# Altium PCB BatteryTestV1.1.PcbDoc (part 2 of 2)
Units mm, origin at the board's own origin, x right, y up, seen from the top; angles counter-clockwise.
Board outline 100 x 100 mm, 2 copper layers (Top Layer, Bottom Layer); 261 components, 215 nets, 797 pads, 447 vias.
Unrouted connection lines stored in the file: 1.
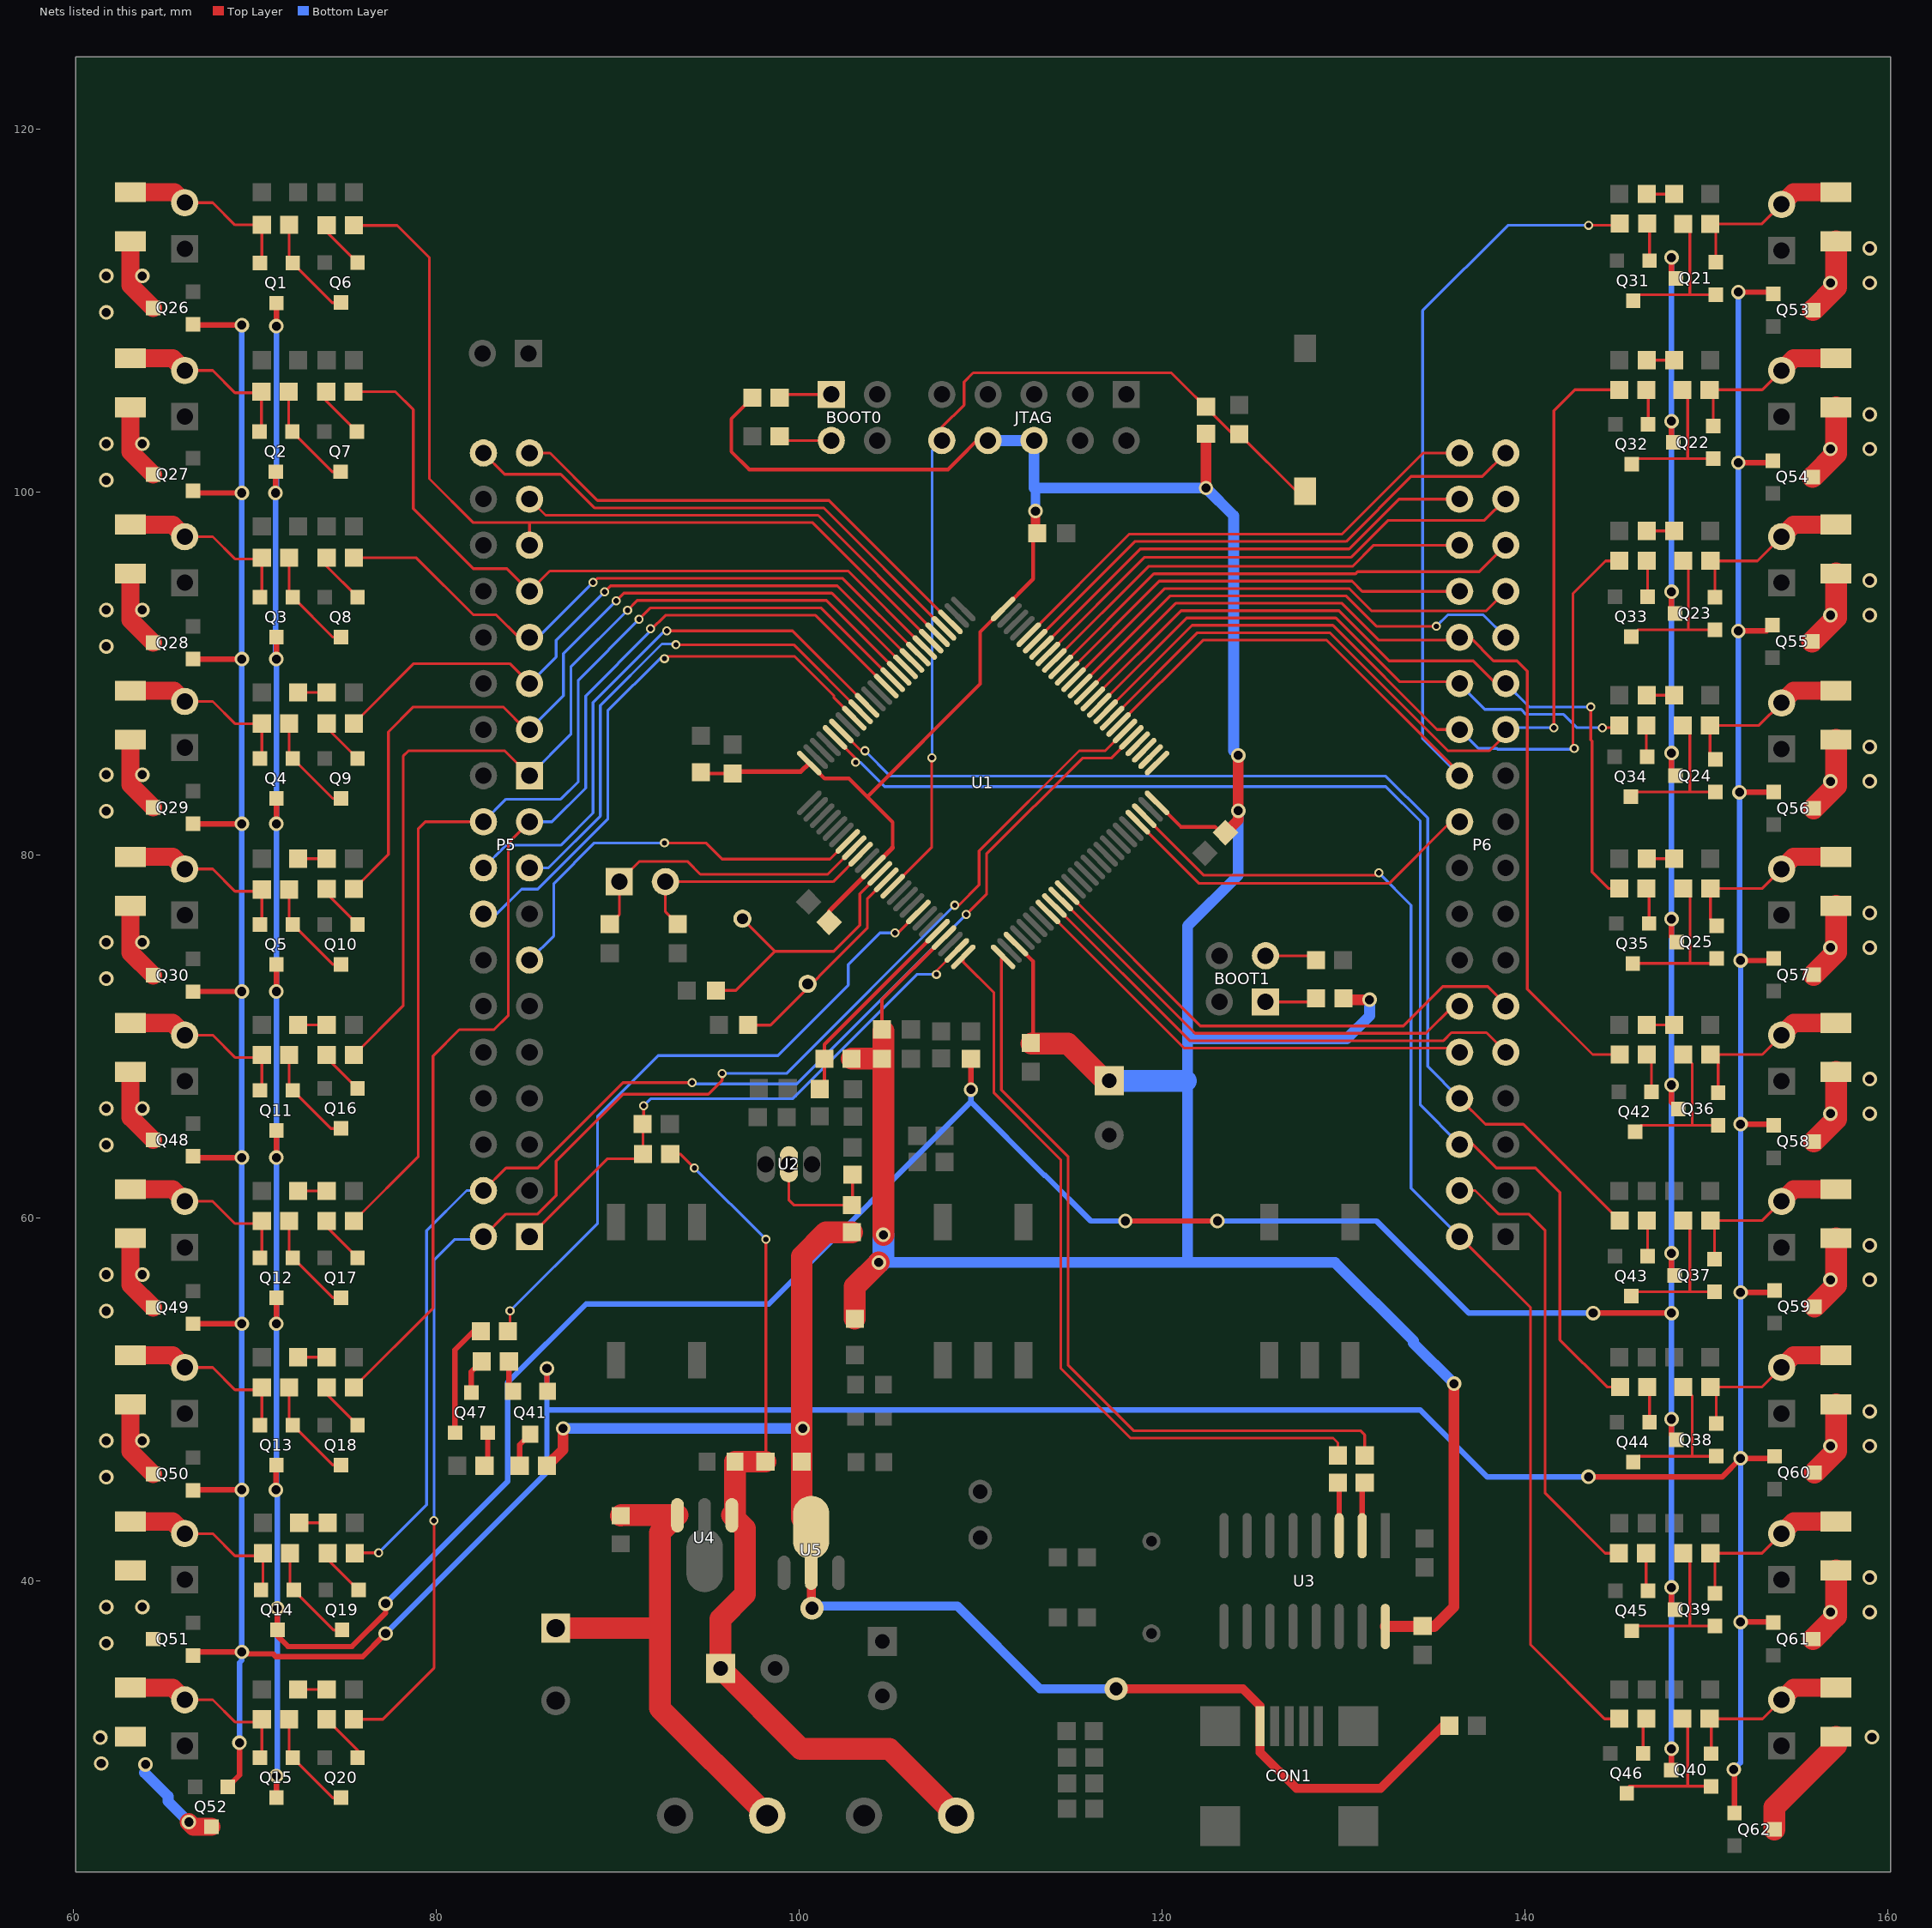
[diagram p2: the nets of this part, all layers, seen from the top]

## Via types
v1: diameter 0.5, hole 0.3, Top Layer to Bottom Layer, tented both sides, 269 vias
v2: diameter 0.8, hole 0.5, Top Layer to Bottom Layer, tented both sides, 174 vias
v3: diameter 0.9, hole 0.9, Top Layer to Bottom Layer, tented both sides, 2 vias
v4: diameter 1.27, hole 0.711, Top Layer to Bottom Layer, tented both sides, 2 vias

## Nets (pads, with @x,y where several pads share a name; then routed paths per layer and width w, separated by ;. In a path a pad name is that pad's centre, name@x,y a point inside that pad or via, vN(x,y) a via of type N, cw(c..) or ccw(c..) an arc to the next point about the centre after c; other vN are vias at no path point) (continued)
NetLED8_2: LED8.2 R74.2 | length 1.6
  Top Layer w0.152: LED8.2@72.399,88.935 R74.2@73.967,88.935
NetLED9_2: LED9.2 R77.1 | length 1.5
  Top Layer w0.152: R77.1@146.71,70.624 LED9.2@148.225,70.624
NetLED10_2: LED10.2 R76.2 | length 1.6
  Top Layer w0.152: LED10.2@72.399,79.78 R76.2@73.967,79.78
NetLED11_2: LED11.2 R79.1 | length 1.5
  Top Layer w0.152: R79.1@146.71,79.78 LED11.2@148.225,79.78
NetLED12_2: LED12.2 R78.2 | length 1.6
  Top Layer w0.152: LED12.2@72.399,70.624 R78.2@73.967,70.624
NetLED13_2: LED13.2 R81.1 | length 1.5
  Top Layer w0.152: R81.1@146.71,88.783 LED13.2@148.225,88.783
NetLED14_2: LED14.2 R80.2 | length 1.6
  Top Layer w0.152: LED14.2@72.399,61.469 R80.2@73.967,61.469
NetLED15_2: LED15.2 R83.1 | length 1.5
  Top Layer w0.152: R83.1@146.71,97.837 LED15.2@148.225,97.837
NetLED16_2: LED16.2 R82.2 | length 1.6
  Top Layer w0.152: LED16.2@72.399,52.313 R82.2@73.967,52.313
NetLED17_2: LED17.2 R85.1 | length 1.5
  Top Layer w0.152: R85.1@146.71,107.25 LED17.2@148.225,107.25
NetLED18_2: LED18.2 R84.2 | length 1.6
  Top Layer w0.152: LED18.2@72.45,43.183 R84.2@74.018,43.183
NetLED19_2: LED19.2 R87.1 | length 1.5
  Top Layer w0.152: R87.1@146.71,116.402 LED19.2@148.225,116.402
NetLED20_2: LED20.2 R86.2 | length 1.6
  Top Layer w0.152: LED20.2@72.399,34.002 R86.2@73.967,34.002
NetP7_1: BOOT1.1 R88.1 | length 2.9
  Top Layer w0.152: BOOT1.1@125.705,71.888 128.301,71.888 R88.1@128.499,72.085
NetP7_3: BOOT1.3 R104.1 | length 2.9
  Top Layer w0.152: BOOT1.3@125.705,74.428 128.251,74.428 R104.1@128.485,74.193
NetP8_1: BOOT0.1 R109.1 | length 2.9
  Top Layer w0.152: R109.1@98.933,105.181 99.111,105.359 BOOT0.1@101.778,105.359
NetP8_3: BOOT0.3 R110.1 | length 2.9
  Top Layer w0.152: R110.1@98.933,103.048 99.162,102.819 BOOT0.3@101.778,102.819
NetQ1_1: Q1.1 Q6.1 R1.1 | length 5.8
  Top Layer w0.152: R1.1@71.899,114.701 71.899,112.794 Q1.1@72.099,112.594 74.274,110.419 Q6.1@74.767,110.419
NetQ1_3: Q1.3 Q2.3 Q3.3 Q4.3 Q5.3 Q11.3 Q12.3 Q13.3 Q14.3 Q15.3 Q21.3 Q22.3 Q23.3 Q24.3 Q25.3 Q36.3 Q37.3 Q38.3 Q39.3 Q40.3 R21.2 | length 289
  Top Layer w0.3: v2(71.145,99.934) 71.145,101.074 Q2.3@71.174,101.103 ; v2(71.171,44.997) 71.171,46.343 Q13.3@71.199,46.371 ; v2(71.196,29.235) 71.199,29.232 Q15.3@71.199,28.034 ; v2(71.196,54.153) 71.196,55.588 Q12.3@71.199,55.591 ; v2(71.196,63.308) 71.196,64.81 Q11.3@71.199,64.813 ; v2(71.196,72.464) 71.196,73.954 Q5.3@71.199,73.957 ; v2(71.196,81.697) 71.196,83.098 Q4.3@71.199,83.101 ; v2(71.196,90.775) 71.196,91.988 Q3.3@71.199,91.991 ; v2(71.196,109.118) 71.199,109.122 Q1.3@71.199,110.394 ; Q14.3@71.247,37.279 v2(71.247,38.481) ; Q14.3@71.25,37.279 71.25,36.954 71.836,36.368 75.357,36.368 77.216,38.227 v2(77.216,38.735) ; v2(109.474,67.056) R21.2@109.474,68.758 ; v2(117.983,59.817) v2(123.063,59.817) ; v2(143.764,54.737) v2(148.082,54.737) ; Q40.3@148.074,29.566 148.082,29.573 v2(148.082,30.734) ; v2(148.082,39.624) 148.082,38.6 Q39.3@148.277,38.405 ; v2(148.082,48.895) 148.082,48.024 Q38.3@148.354,47.752 ; v2(148.082,58.039) 148.082,56.99 Q37.3@148.252,56.82 ; v2(148.082,67.31) 148.082,66.362 Q36.3@148.455,65.989 ; v2(148.082,76.454) 148.082,75.481 Q25.3@148.379,75.184 ; v2(148.082,85.598) 148.082,84.582 Q24.3@148.311,84.353 ; v2(148.082,94.488) 148.082,93.49 Q23.3@148.277,93.294 ; v2(148.082,103.886) 148.082,102.811 Q22.3@148.176,102.718 ; v2(148.082,112.903) 148.082,112.001 Q21.3@148.323,111.76
  Bottom Layer w0.3: v2(71.196,29.235) 71.272,29.312 71.247,29.337 v2(71.247,38.481) 71.247,44.921 v2(71.171,44.997) 71.196,45.023 v2(71.196,54.153) v2(71.196,63.308) v2(71.196,72.464) v2(71.196,81.697) v2(71.196,90.775) 71.145,90.826 v2(71.145,99.934) 71.196,99.985 v2(71.196,109.118) ; v2(77.216,38.735) 83.947,45.466 83.947,50.927 88.265,55.245 98.334,55.245 109.474,66.385 ; v2(109.474,67.056) 109.474,66.385 ; v2(117.983,59.817) 116.078,59.817 113.557,62.338 113.521,62.338 109.474,66.385 ; v2(123.063,59.817) 131.826,59.817 136.906,54.737 v2(143.764,54.737) ; v2(148.082,30.734) v2(148.082,39.624) v2(148.082,48.895) v2(148.082,54.737) v2(148.082,58.039) v2(148.082,67.31) v2(148.082,76.454) v2(148.082,85.598) v2(148.082,94.488) v2(148.082,103.886) v2(148.082,112.903)
NetQ2_1: Q2.1 Q7.1 R2.1 | length 5.9
  Top Layer w0.152: R2.1@71.874,105.512 71.874,103.503 Q2.1@72.074,103.303 74.274,101.103 Q7.1@74.742,101.103
NetQ3_1: Q3.1 Q8.1 R3.1 | length 5.8
  Top Layer w0.152: R3.1@71.899,96.368 71.899,94.391 Q3.1@72.099,94.191 74.299,91.991 Q8.1@74.767,91.991
NetQ4_1: Q4.1 Q9.1 R4.1 | length 5.6
  Top Layer w0.152: R4.1@71.899,87.224 71.899,85.501 Q4.1@72.099,85.301 74.299,83.101 Q9.1@74.767,83.101
NetQ5_1: Q5.1 Q10.1 R5.1 | length 5.6
  Top Layer w0.152: R5.1@71.899,78.08 71.899,76.357 Q5.1@72.099,76.157 74.299,73.957 Q10.1@74.767,73.957
NetQ6_2: Q6.2 R6.1 | length 2.8
  Top Layer w0.152: R6.1@73.967,114.676 73.967,114.319 Q6.2@75.667,112.619
NetQ7_2: Q7.2 R7.1 | length 2.9
  Top Layer w0.152: R7.1@73.942,105.512 73.942,105.003 Q7.2@75.642,103.303
NetQ8_2: Q8.2 R8.1 | length 2.9
  Top Layer w0.152: R8.1@73.967,96.368 73.967,95.891 Q8.2@75.667,94.191
NetQ9_2: Q9.2 R9.1 | length 2.6
  Top Layer w0.152: R9.1@73.967,87.224 73.967,87.001 Q9.2@75.667,85.301
NetQ10_2: Q10.2 R10.1 | length 2.7
  Top Layer w0.152: R10.1@73.967,78.105 73.967,77.857 Q10.2@75.667,76.157
NetQ11_1: Q11.1 Q16.1 R11.1 | length 5.6
  Top Layer w0.152: R11.1@71.899,68.961 71.899,67.213 Q11.1@72.099,67.013 74.198,64.915 Q16.1@74.767,64.915
NetQ12_1: Q12.1 Q17.1 R12.1 | length 5.7
  Top Layer w0.152: R12.1@71.899,59.817 71.899,57.991 Q12.1@72.099,57.791 74.299,55.591 Q17.1@74.767,55.591
NetQ13_1: Q13.1 Q18.1 R13.1 | length 5.7
  Top Layer w0.152: R13.1@71.899,50.648 71.899,48.771 Q13.1@72.099,48.571 74.299,46.371 Q18.1@74.767,46.371
NetQ14_1: Q14.1 Q19.1 R14.1 | length 5.7
  Top Layer w0.152: R14.1@71.95,41.504 71.95,39.679 Q14.1@72.15,39.479 74.35,37.279 Q19.1@74.818,37.279
NetQ15_1: Q15.1 Q20.1 R15.1 | length 5.8
  Top Layer w0.152: R15.1@71.899,32.36 71.899,30.434 Q15.1@72.099,30.234 74.299,28.034 Q20.1@74.767,28.034
NetQ16_2: Q16.2 R16.1 | length 2.6
  Top Layer w0.152: R16.1@73.967,68.961 73.967,68.815 Q16.2@75.667,67.115
NetQ17_2: Q17.2 R17.1 | length 2.7
  Top Layer w0.152: R17.1@73.967,59.817 73.967,59.491 Q17.2@75.667,57.791
NetQ18_2: Q18.2 R18.1 | length 2.8
  Top Layer w0.152: R18.1@73.967,50.648 73.967,50.271 Q18.2@75.667,48.571
NetQ19_2: Q19.2 R19.1 | length 2.7
  Top Layer w0.152: R19.1@74.018,41.504 74.018,41.179 Q19.2@75.718,39.479
NetQ20_2: Q20.2 R20.1 | length 2.8
  Top Layer w0.152: R20.1@73.967,32.36 75.667,30.66 Q20.2@75.667,30.234
NetQ21_1: Q21.1 Q31.1 R27.1 | length 8.7
  Top Layer w0.152: Q31.1@145.974,110.533 146.301,110.86 149.098,110.86 ; R27.1@148.725,114.757 149.098,114.384 149.098,110.86 ; Q21.1@150.523,110.86 149.098,110.86
NetQ22_1: Q22.1 Q32.1 R28.1 | length 8.5
  Top Layer w0.152: Q32.1@145.898,101.516 146.199,101.818 148.971,101.818 ; R28.1@148.678,105.613 148.971,105.32 148.971,101.818 ; Q22.1@150.376,101.818 148.971,101.818
NetQ23_1: Q23.1 Q33.1 R29.1 | length 8.7
  Top Layer w0.152: Q33.1@145.872,92.016 146.25,92.394 148.971,92.394 ; R29.1@148.729,96.19 149.007,95.911 149.007,92.431 148.971,92.394 ; Q23.1@150.477,92.394 148.971,92.394
NetQ24_1: Q24.1 Q34.1 R30.1 | length 8.6
  Top Layer w0.152: Q34.1@145.847,83.203 146.098,83.453 149.098,83.453 ; R30.1@148.704,87.122 149.098,86.728 149.098,83.453 ; Q24.1@150.511,83.453 149.098,83.453
NetQ25_1: Q25.1 Q35.1 R31.1 | length 9
  Top Layer w0.152: Q35.1@145.948,74.008 149.098,74.008 ; R31.1@148.729,78.13 149.109,77.75 149.109,74.019 149.098,74.008 ; Q25.1@150.579,74.284 150.303,74.008 149.098,74.008
NetQ26_1: Q26.1 Q27.1 Q28.1 Q29.1 Q30.1 Q41.1 Q48.1 Q49.1 Q50.1 Q51.1 Q52.1 Q53.1 Q54.1 Q55.1 Q56.1 Q57.1 Q58.1 Q59.1 Q60.1 Q61.1 Q62.1 | length 302.6
  Top Layer w0.3: Q51.1@66.598,35.842 66.824,36.068 v2(69.291,36.068) 69.395,35.965 71.008,35.965 71.159,35.814 75.946,35.814 77.089,36.957 v2@77.089,37.211 ; Q50.1@66.598,44.997 v2(69.291,44.997) ; Q49.1@66.598,54.153 v2(69.291,54.153) ; Q48.1@66.598,63.308 v2(69.291,63.308) ; Q30.1@66.598,72.464 v2(69.291,72.464) ; Q29.1@66.598,81.697 v2(69.291,81.697) ; Q28.1@66.598,90.775 v2(69.291,90.775) ; Q27.1@66.598,99.934 v2(69.291,99.934) ; Q26.1@66.598,109.181 v2(69.291,109.181) ; Q52.1@68.515,28.634 69.164,29.283 v2(69.164,31.064) ; v2(86.106,51.689) 86.106,50.461 Q41.1@86.142,50.426 ; v2(143.51,45.72) 150.876,45.72 v2(151.892,46.736) 153.622,46.736 153.749,46.863 Q60.1@153.764,46.849 ; v2(151.511,29.591) 151.554,29.548 Q62.1@151.554,27.189 ; v2(151.765,92.329) 153.321,92.329 Q55.1@153.637,92.645 ; v2(151.765,101.6) 153.521,101.6 153.648,101.727 Q54.1@153.662,101.713 ; v2(151.765,110.998) 153.524,110.998 153.651,110.871 Q53.1@153.688,110.907 ; v2(151.828,83.439) 153.702,83.439 Q56.1@153.713,83.45 ; v2(151.892,37.719) 153.648,37.719 Q61.1@153.688,37.679 ; v2(151.892,55.88) 153.651,55.88 Q59.1@153.764,55.993 ; v2(151.892,65.151) 153.667,65.151 Q58.1@153.721,65.097 ; v2(151.892,74.168) 153.572,74.168 153.699,74.295 Q57.1@153.713,74.281
  Bottom Layer w0.3: v2(69.164,31.064) 69.164,35.484 69.291,35.611 v2(69.291,36.068) v2(69.291,44.997) v2(69.291,54.153) v2(69.291,63.308) v2(69.291,72.464) v2(69.291,81.697) v2(69.291,90.775) v2(69.291,99.934) v2(69.291,109.181) ; v2(77.216,37.084) 86.106,45.974 86.106,49.403 ; v2@85.979,51.562 v2(86.106,51.689) 86.106,49.403 ; v2(143.51,45.72) 137.922,45.72 134.239,49.403 86.106,49.403 ; v2(151.511,29.591) 151.892,29.972 v2(151.892,37.719) v2(151.892,46.736) v2(151.892,55.88) v2(151.892,65.151) v2(151.892,74.168) 151.828,74.231 v2(151.828,83.439) 151.765,83.502 v2(151.765,92.329) v2(151.765,101.6) v2(151.765,110.998)
NetQ26_3: Q26.3 R22.1 | length 4.2
  Top Layer w1: R22.1@63.147,113.802 63.147,111.377 Q26.3@64.397,110.127
  other v2: 61.824,109.88 61.824,111.887 63.805,111.887
NetQ27_3: Q27.3 R23.1 | length 4.2
  Top Layer w1: R23.1@63.147,104.65 63.147,102.202 Q27.3@64.397,100.952
  other v2: 61.824,100.633 61.824,102.64 63.805,102.64
NetQ28_3: Q28.3 R24.1 | length 4.3
  Top Layer w1: R24.1@63.147,95.491 63.147,92.927 Q28.3@64.397,91.677
  other v2: 61.824,91.474 61.824,93.481 63.805,93.481
NetQ29_3: Q29.3 R25.1 | length 4.3
  Top Layer w1: R25.1@63.147,86.335 63.147,83.852 Q29.3@64.397,82.602
  other v2: 61.824,82.396 61.824,84.403 63.805,84.403
NetQ30_3: Q30.3 R26.1 | length 4.3
  Top Layer w1: R26.1@63.147,77.18 63.147,74.602 Q30.3@64.397,73.352
  other v2: 61.824,73.163 61.824,75.17 63.805,75.17
NetQ31_2: Q31.2 R33.1 | length 2.1
  Top Layer w0.152: R33.1@146.736,114.783 146.874,114.645 Q31.2@146.874,112.733
NetQ32_2: Q32.2 R34.1 | length 1.9
  Top Layer w0.152: R34.1@146.698,105.613 146.798,105.514 Q32.2@146.798,103.716
NetQ33_2: Q33.2 R35.1 | length 2
  Top Layer w0.152: R35.1@146.71,96.19 146.772,96.128 Q33.2@146.772,94.216
NetQ34_2: Q34.2 R36.1 | length 1.7
  Top Layer w0.152: R36.1@146.698,87.122 146.698,85.451 Q34.2@146.747,85.403
NetQ35_2: Q35.2 R37.1 | length 2
  Top Layer w0.152: R37.1@146.698,78.13 146.848,77.98 Q35.2@146.848,76.208
NetQ36_1: Q36.1 Q42.1 R38.1 | length 8.8
  Top Layer w0.152: Q42.1@146.075,64.737 146.428,65.089 149.225,65.089 ; R38.1@148.729,68.986 149.225,68.49 149.225,65.089 ; Q36.1@150.655,65.089 149.225,65.089
NetQ37_1: Q37.1 Q43.1 R39.1 | length 8.8
  Top Layer w0.152: Q43.1@145.872,55.669 146.123,55.92 149.098,55.92 ; R39.1@148.729,59.842 149.098,59.473 149.098,55.92 ; Q37.1@150.452,55.92 149.098,55.92
NetQ38_1: Q38.1 Q44.1 R40.1 | length 8.7
  Top Layer w0.152: Q44.1@145.974,46.525 146.301,46.852 149.225,46.852 ; R40.1@148.729,50.673 149.225,50.177 149.225,46.852 ; Q38.1@150.554,46.852 149.225,46.852
NetQ39_1: Q39.1 Q45.1 R41.1 | length 8.8
  Top Layer w0.152: Q45.1@145.898,37.229 146.174,37.505 149.098,37.505 ; R41.1@148.729,41.504 149.098,41.135 149.098,37.505 ; Q39.1@150.477,37.505 149.098,37.505
NetQ40_1: Q40.1 Q46.1 R42.1 | length 8.4
  Top Layer w0.152: Q46.1@145.76,28.666 148.971,28.666 ; R42.1@148.678,32.385 148.971,32.092 148.971,28.666 ; Q40.1@150.274,28.666 148.971,28.666
NetQ41_2: Q41.2 R49.1 | length 1.7
  Top Layer w0.3: R49.1@84.011,52.07 84.011,50.656 Q41.2@84.242,50.426
NetQ41_3: Q41.3 R48.2 | length 2
  Top Layer w0.3: R48.2@84.607,46.33 84.607,47.491 Q41.3@85.192,48.076
NetQ42_2: Q42.2 R50.1 | length 2.2
  Top Layer w0.152: R50.1@146.724,68.986 146.975,68.735 Q42.2@146.975,66.937
NetQ43_2: Q43.2 R51.1 | length 2
  Top Layer w0.152: R51.1@146.724,59.842 146.772,59.794 Q43.2@146.772,57.869
NetQ44_2: Q44.2 R52.1 | length 2
  Top Layer w0.152: R52.1@146.749,50.673 146.874,50.548 Q44.2@146.874,48.725
NetQ45_2: Q45.2 R53.1 | length 2.1
  Top Layer w0.152: R53.1@146.685,41.504 146.685,39.541 Q45.2@146.798,39.429
NetQ46_2: Q46.2 R54.1 | length 2
  Top Layer w0.152: Q46.2@146.518,30.488 146.518,32.205 R54.1@146.698,32.385
NetQ47_1: Q47.1 R49.2 | length 2
  Top Layer w0.3: Q47.1@81.94,50.351 81.94,51.499 R49.2@82.511,52.07
NetQ47_2: Q47.2 R55.1 | length 6.4
  Top Layer w0.3: Q47.2@81.04,48.151 81.04,52.719 82.067,53.746 R55.1@82.46,53.746
NetQ47_3: Q47.3 R56.1 | length 1.9
  Top Layer w0.3: R56.1@82.665,46.33 82.84,46.505 Q47.3@82.84,48.151
NetQ48_3: Q48.3 R43.1 | length 4.3
  Top Layer w1: R43.1@63.147,68.024 63.147,65.527 Q48.3@64.397,64.277
  other v2: 61.824,64.008 61.824,66.014 63.805,66.014
NetQ49_3: Q49.3 R44.1 | length 4.3
  Top Layer w1: R44.1@63.147,58.869 63.147,56.302 Q49.3@64.397,55.052
  other v2: 61.824,54.852 61.824,56.859 63.805,56.859
NetQ50_3: Q50.3 R45.1 | length 4.4
  Top Layer w1: R45.1@63.147,49.713 63.147,47.127 Q50.3@64.397,45.877
  other v2: 61.824,45.697 61.824,47.703 63.805,47.703
NetQ51_3: Q51.3 R46.1
  other v2: 61.824,36.541 61.824,38.548 63.805,38.548
NetQ52_3: Q52.3 R47.1 | length 5.1
  Top Layer w1: v2(66.37,26.695) 66.632,26.434 Q52.3@67.615,26.434
  Bottom Layer w0.6: 63.932,29.413 65.227,28.118 65.227,27.838 v2(66.37,26.695)
  other v2: 63.983,29.87 61.544,29.921 61.493,31.344
NetQ53_3: Q53.3 R57.1 | length 4.3
  Top Layer w1.2: Q53.3@155.888,110.007 157.147,111.267 R57.1@157.147,113.802
  other v2: 156.845,111.506 159.004,111.506 159.004,113.411
NetQ54_3: Q54.3 R58.1 | length 4.4
  Top Layer w1.2: Q54.3@155.862,100.813 157.147,102.098 R58.1@157.147,104.65
  other v2: 156.845,102.354 159.004,102.354 159.004,104.259
NetQ55_3: Q55.3 R59.1 | length 4.3
  Top Layer w1.2: Q55.3@155.837,91.745 157.147,93.055 R59.1@157.147,95.491
  other v2: 156.845,93.195 159.004,93.195 159.004,95.1
NetQ56_3: Q56.3 R60.1 | length 4.3
  Top Layer w1.2: Q56.3@155.913,82.55 157.147,83.784 R60.1@157.147,86.335
  other v2: 156.845,84.039 159.004,84.039 159.004,85.944
NetQ57_3: Q57.3 R61.1 | length 4.3
  Top Layer w1.2: Q57.3@155.913,73.381 157.147,74.615 R61.1@157.147,77.18
  other v2: 156.845,74.884 159.004,74.884 159.004,76.789
NetQ58_3: Q58.3 R69.1 | length 4.3
  Top Layer w1.2: Q58.3@155.921,64.197 157.147,65.423 R69.1@157.147,68.024
  other v2: 156.845,65.728 159.004,65.728 159.004,67.633
NetQ59_3: Q59.3 R70.1 | length 4.3
  Top Layer w1.2: Q59.3@155.964,55.093 157.147,56.276 R70.1@157.147,58.869
  other v2: 156.845,56.573 159.004,56.573 159.004,58.478
NetQ60_3: Q60.3 R71.1 | length 4.3
  Top Layer w1.2: Q60.3@155.964,45.949 157.147,47.132 R71.1@157.147,49.713
  other v2: 156.845,47.417 159.004,47.417 159.004,49.322
NetQ61_3: Q61.3 R72.1 | length 4.3
  Top Layer w1.2: Q61.3@155.888,36.779 157.147,38.039 R72.1@157.147,40.558
  other v2: 156.845,38.262 159.004,38.262 159.004,40.167
NetQ62_3: Q62.3 R73.1 | length 6.5
  Top Layer w1.2: Q62.3@153.754,26.289 153.754,27.516 157.147,30.909 R73.1@157.147,31.402
  other v2: 159.131,31.369
NetR96_2: R96.2 R98.2 U2.2 | length 7.3
  Top Layer w0.152: U2.2@99.441,62.941 99.441,60.96 99.707,60.694 R98.2@102.921,60.694 102.946,60.719 R96.2@102.946,62.369
NetR100_1: R100.1 U3.2 | length 3
  Top Layer w0.3: U3.2@131.038,42.473 131.038,45.265 R100.1@131.173,45.399
NetR101_1: R101.1 U3.3 | length 3
  Top Layer w0.3: R101.1@129.698,45.399 129.768,45.329 U3.3@129.768,42.473
NRST: C26.2 Designator15.2 JTAG.10 R108.1 U1.14 | length 51.3
  Top Layer w0.152: U1.14@105.162,78.26 107.315,80.413 v1(107.315,85.344) ; JTAG.10@107.874,102.819 107.874,103.556 109.093,104.775 109.093,106.045 109.601,106.553 120.523,106.553 123.059,104.017 123.065,104.017 123.258,103.824 123.258,103.818 124.079,102.997 C26.2@124.257,103.175 127.406,100.025 Designator15.2@127.889,100.025
  Bottom Layer w0.152: v1@107.34,85.344 107.34,102.286 JTAG.10@107.874,102.819
OSC32_IN: C13.1 U1.8 Y1.1 | length 16.9
  Top Layer w0.152: C13.1@89.57,76.167 90.094,76.691 Y1.1@90.094,78.511 91.211,79.629 93.853,79.629 94.565,78.917 101.577,78.917 U1.8@103.041,80.381
OSC32_OUT: C14.1 U1.9 Y1.2 | length 14
  Top Layer w0.152: C14.1@93.32,76.167 92.634,76.853 Y1.2@92.634,78.511 101.878,78.511 U1.9@103.394,80.028
OSC_IN: C11.1 U1.12 Y2.2 | length 15.3
  Top Layer w0.152: C11.1@95.415,72.517 96.52,72.517 98.679,74.676 ; Y2.2@96.883,76.472 98.679,74.676 ; U1.12@104.455,78.967 104.455,78.939 103.353,77.837 103.353,76.114 101.915,74.676 98.679,74.676
OSC_OUT: C15.1 U1.13 Y2.1 | length 11.9
  Top Layer w0.152: C15.1@97.193,70.612 98.425,70.612 103.759,75.946 103.759,77.564 U1.13@104.809,78.613 U1.13@104.809,78.585
PA1: P5.1 R105.2 R106.1 U1.24 | length 31.7
  Top Layer w0.152: P5.1@85.147,58.952 89.441,63.246 91.147,63.246 R106.1@91.401,63.5 91.401,65.126 91.44,65.164 v1(91.44,66.167) ; v1(107.569,73.406) 107.569,73.596 U1.24@108.698,74.724
  Bottom Layer w0.152: v1(91.44,66.167) 91.821,66.548 99.634,66.548 106.492,73.406 v1(107.569,73.406)
PA2: R101.2 U1.25 | length 42.6
  Top Layer w0.152: U1.25@109.051,74.371 109.051,74.083 110.744,72.39 110.744,66.863 114.427,63.18 114.427,51.689 118.262,47.854 129.438,47.854 129.698,47.594 R101.2@129.698,46.899
PA3: R100.2 U1.26 | length 43.1
  Top Layer w0.152: U1.26@111.243,74.371 111.15,74.277 111.15,67.031 114.833,63.348 114.833,51.857 118.43,48.26 130.937,48.26 131.173,48.024 R100.2@131.173,46.899
PA8: P6.32 U1.67 | length 25
  Top Layer w0.152: U1.67@114.072,90.705 119.252,95.885 130.501,95.885 131.668,97.052 P6.32@136.407,97.052
PA9: P6.33 U1.68 | length 28.8
  Top Layer w0.152: U1.68@113.718,91.058 119.053,96.393 130.434,96.393 132.466,98.425 137.78,98.425 P6.33@138.947,99.592
PA10: P6.34 U1.69 | length 26.4
  Top Layer w0.152: U1.69@113.365,91.412 118.804,96.851 130.318,96.851 133.059,99.592 P6.34@136.407,99.592
PA11: P6.35 U1.70 | length 30.2
  Top Layer w0.152: U1.70@113.011,91.766 118.502,97.257 130.15,97.257 133.731,100.838 137.653,100.838 P6.35@138.947,102.132
PA12: P6.36 U1.71 | length 27.9
  Top Layer w0.152: U1.71@112.657,92.119 118.201,97.663 129.921,97.663 134.39,102.132 P6.36@136.407,102.132
PB0: P6.12 U1.35 | length 25.7
  Top Layer w0.152: U1.35@114.425,77.553 121.824,70.154 134.543,70.154 136.041,71.652 P6.12@136.407,71.652
PB1: P6.11 U1.36 | length 28.6
  Top Layer w0.152: U1.36@114.779,77.906 122.125,70.56 133.298,70.56 135.47,72.732 137.961,72.732 138.947,71.746 P6.11@138.947,71.652
PB5: P5.18 U1.91 | length 31.8
  Top Layer w0.152: v1(92.71,92.329) 99.649,92.329 U1.91@103.748,88.23
  Bottom Layer w0.152: P5.18@82.607,79.272 83.853,80.518 86.868,80.518 88.646,82.296 88.646,88.39 92.585,92.329 v1(92.71,92.329)
PB6: P5.17 U1.92 | length 28.5
  Top Layer w0.152: v1(93.218,91.567) 99.704,91.567 U1.92@103.394,87.876
  Bottom Layer w0.152: P5.17@85.147,79.272 86.197,79.272 89.052,82.128 89.052,88.222 92.442,91.612 93.173,91.612 v1(93.218,91.567)
PB7: P5.16 U1.93 | length 31.3
  Top Layer w0.152: v1(92.583,90.805) 92.71,90.932 99.745,90.932 101.926,88.751 101.926,88.637 U1.93@103.041,87.523
  Bottom Layer w0.152: P5.16@82.607,76.732 83.336,76.732 84.709,78.105 85.604,78.105 89.459,81.959 89.459,87.935 92.329,90.805 v1(92.583,90.805)
PB8: P6.8 R51.2 U1.95 | length 62.2
  Top Layer w0.152: U1.95@102.334,86.816 103.424,85.725 v1(103.632,85.725) 103.678,85.725 v1@103.759,85.644 ; P6.8@136.407,66.572 137.828,65.151 139.915,65.151 R51.2@145.224,59.842
  Bottom Layer w0.152: v1(103.632,85.725) 105.029,84.328 132.334,84.328 134.645,82.017 134.645,68.334 P6.8@136.407,66.572
PB9: P6.6 R52.2 U1.96 | length 72.2
  Top Layer w0.152: U1.96@101.98,86.462 103.124,85.318 v1(103.124,85.09) ; P6.6@136.407,64.032 137.136,64.032 138.43,62.738 140.589,62.738 141.934,61.393 141.934,53.265 144.526,50.673 R52.2@145.249,50.673
  Bottom Layer w0.152: v1(103.124,85.09) 103.378,85.09 104.72,83.748 132.339,83.748 134.239,81.848 134.239,66.2 P6.6@136.407,64.032
PB10: P6.4 P6.20 R53.2 U1.47 | length 46.1
  Top Layer w0.152: U1.47@118.668,81.795 122.049,78.414 132.516,78.414 135.914,81.812 P6.20@136.407,81.812 ; P6.4@136.407,61.492 137.263,61.492 138.557,60.198 140.208,60.198 141.122,59.284 141.122,44.806 144.424,41.504 R53.2@145.185,41.504
PB11: P6.2 R54.2 U1.48 | length 66.9
  Top Layer w0.152: U1.48@119.021,82.149 122.303,78.867 131.826,78.867 v1(131.953,78.994) ; P6.2@136.407,58.952 140.31,55.049 140.31,36.474 144.399,32.385 R54.2@145.198,32.385
  Bottom Layer w0.152: v1(131.953,78.994) 133.731,77.216 133.731,61.628 P6.2@136.407,58.952
PB12: U1.51
PB13: U1.52
PB14: U1.53
PB15: U1.54
PC3: R55.2 U1.18 | length 36.9
  Top Layer w0.152: R55.2@83.96,53.746 84.074,53.86 v1(84.074,54.864) ; v1(105.283,75.692) 105.451,75.692 106.548,76.79 106.548,76.846 U1.18@106.576,76.846
  Bottom Layer w0.152: v1(84.074,54.864) 88.9,59.69 88.9,65.599 92.233,68.932 98.837,68.932 102.718,72.812 102.718,73.947 104.462,75.692 v1(105.283,75.692)
PC4: P6.10 U1.33 | length 25.9
  Top Layer w0.152: U1.33@113.718,76.846 121.222,69.342 136.177,69.342 P6.10@136.407,69.112
PC5: P6.9 U1.34 | length 28.6
  Top Layer w0.152: U1.34@114.072,77.199 121.523,69.748 135.516,69.748 135.96,70.192 137.883,70.192 138.947,69.128 P6.9@138.947,69.112
PC6: P6.27 U1.63 | length 27
  Top Layer w0.152: U1.63@115.486,89.291 120.456,94.261 130.143,94.261 131.821,92.583 v1(135.128,92.583)
  Bottom Layer w0.152: v1(135.128,92.583) 135.763,93.218 137.701,93.218 P6.27@138.947,91.972
PC7: P6.29 U1.64 | length 26.9
  Top Layer w0.152: U1.64@115.132,89.644 120.155,94.667 130.311,94.667 131.546,93.432 137.867,93.432 P6.29@138.947,94.512
PC8: P6.30 U1.65 | length 24
  Top Layer w0.152: U1.65@114.779,89.998 119.854,95.073 130.479,95.073 131.04,94.512 P6.30@136.407,94.512
PC9: P6.31 U1.66 | length 27.3
  Top Layer w0.152: U1.66@114.425,90.351 119.553,95.479 130.669,95.479 130.782,95.592 137.487,95.592 P6.31@138.947,97.052
PC10: P5.35 U1.78 | length 27.1
  Top Layer w0.152: P5.35@85.147,102.132 86.275,102.132 88.891,99.516 101.654,99.516 U1.78@108.344,92.826
PC11: P5.36 U1.79 | length 29.4
  Top Layer w0.152: P5.36@82.607,102.132 83.774,100.965 86.868,100.965 88.723,99.11 101.353,99.11 U1.79@107.991,92.473
PC12: P5.33 U1.80 | length 25.6
  Top Layer w0.152: P5.33@85.147,99.592 86.035,98.704 101.052,98.704 U1.80@107.637,92.119
PC13: P5.13 U1.7 | length 22.7
  Top Layer w0.152: v1(92.583,80.645) 94.869,80.645 95.758,79.756 101.709,79.756 U1.7@102.687,80.735
  Bottom Layer w0.152: P5.13@85.147,74.192 86.487,75.532 86.487,78.413 88.719,80.645 v1(92.583,80.645)
PD0: P5.31 R6.2 U1.81 | length 49.7
  Top Layer w0.152: R6.2@75.467,114.676 77.856,114.676 79.629,112.903 79.629,100.711 82.042,98.298 100.751,98.298 U1.81@107.283,91.766 ; 85.09,98.298 85.147,98.241 P5.31@85.147,97.052
PD1: P5.29 R7.2 U1.82 | length 41.5
  Top Layer w0.152: R7.2@75.442,105.512 77.749,105.512 78.74,104.521 78.74,99.06 82.042,95.758 83.901,95.758 P5.29@85.147,94.512 86.266,95.631 102.711,95.631 U1.82@106.93,91.412
PD2: P5.27 R8.2 U1.83 | length 35.8
  Top Layer w0.152: R8.2@75.467,96.368 78.892,96.368 82.042,93.218 83.312,93.218 84.558,91.972 P5.27@85.147,91.972 ; v1@88.773,95.123 88.875,95.225 102.41,95.225 U1.83@106.576,91.058
  Bottom Layer w0.152: P5.27@85.147,91.972 85.622,91.972 v1(88.646,94.996)
PD3: P5.25 R9.2 U1.84 | length 37.1
  Top Layer w0.152: R9.2@75.467,87.224 78.769,90.526 84.053,90.526 P5.25@85.147,89.432 ; v1(89.281,94.488) 89.611,94.818 102.109,94.818 U1.84@106.223,90.705
  Bottom Layer w0.152: P5.25@85.147,89.432 86.614,90.899 86.614,91.821 v1(89.281,94.488)
PD4: P5.23 R10.2 U1.85 | length 45.2
  Top Layer w0.152: R10.2@75.467,78.105 77.368,80.006 77.368,86.766 78.74,88.138 83.693,88.138 84.939,86.892 P5.23@85.147,86.892 ; v1(89.916,93.98) 90.348,94.412 101.809,94.412 U1.85@105.869,90.351
  Bottom Layer w0.152: P5.23@85.147,86.892 87.02,88.765 87.02,91.084 v1(89.916,93.98)
PD5: P5.21 R16.2 U1.86 | length 53.4
  Top Layer w0.152: R16.2@75.467,68.961 78.18,71.674 78.18,85.419 78.486,85.725 83.774,85.725 P5.21@85.147,84.352 ; v1(90.551,93.472) 91.084,94.005 101.508,94.005 U1.86@105.516,89.998
  Bottom Layer w0.152: P5.21@85.147,84.352 87.427,86.632 87.427,90.348 v1(90.551,93.472)
PD6: P5.20 R17.2 U1.87 | length 59.2
  Top Layer w0.152: R17.2@75.467,59.817 79.019,63.369 79.019,81.432 79.399,81.812 P5.20@82.607,81.812 ; v1(91.186,92.964) 91.821,93.599 101.207,93.599 U1.87@105.162,89.644
  Bottom Layer w0.152: P5.20@82.607,81.812 83.853,83.058 86.868,83.058 87.833,84.023 87.833,89.611 v1(91.186,92.964)
PD7: P5.19 R18.2 U1.88 | length 65.4
  Top Layer w0.152: R18.2@75.467,50.648 79.832,55.013 79.832,68.91 81.28,70.358 83.185,70.358 83.98,71.153 83.98,80.645 P5.19@85.147,81.812 ; v1(91.821,92.456) 91.821,92.38 92.634,93.193 100.907,93.193 U1.88@104.809,89.291
  Bottom Layer w0.152: P5.19@85.147,81.812 86.384,81.812 88.24,83.668 88.24,88.748 91.821,92.329 v1(91.821,92.456)
PD8: P5.4 R19.2 U1.55 | length 71.7
  Top Layer w0.152: R19.2@75.518,41.504 75.543,41.529 v1(76.835,41.529) ; P5.4@82.607,61.492 83.853,62.738 85.598,62.738 90.297,67.437 v1(94.107,67.437) ; v1(109.22,76.708) 110.333,77.821 110.333,80.041 115.611,85.319 117.199,85.319 118.286,86.406 118.286,86.462 U1.55@118.314,86.462
  Bottom Layer w0.152: v1(76.835,41.529) 79.477,44.171 79.477,59.284 81.685,61.492 P5.4@82.607,61.492 ; v1(94.107,67.437) 94.179,67.365 99.877,67.365 v1(109.22,76.708)
PD9: P5.2 R20.2 U1.56 | length 80.6
  Top Layer w0.152: R20.2@75.467,32.36 77.064,32.36 79.883,35.179 v1(79.883,43.307) ; P5.2@82.607,58.952 83.853,60.198 85.598,60.198 86.614,61.214 86.614,63.119 90.297,66.802 94.996,66.802 95.758,67.564 v1(95.758,67.945) ; v1(108.585,77.216) 108.809,77.216 109.927,78.334 109.927,80.209 115.443,85.725 116.87,85.725 U1.56@117.961,86.816
  Bottom Layer w0.152: v1(79.883,43.307) 79.883,57.658 81.026,58.801 P5.2@82.607,58.801 ; v1(95.758,67.945) 99.314,67.945 v1(108.585,77.216)
PD10: P6.22 R33.2 U1.57 | length 63.4
  Top Layer w0.152: U1.57@117.607,87.169 122.259,91.821 129.082,91.821 136.203,84.7 136.407,84.7 P6.22@136.407,84.352 ; v1(143.51,114.681) 145.134,114.681 R33.2@145.236,114.783
  Bottom Layer w0.152: P6.22@136.407,84.352 134.366,86.393 134.366,109.982 139.065,114.681 v1(143.51,114.681)
PD11: P6.23 R34.2 U1.58 | length 51.2
  Top Layer w0.152: U1.58@117.254,87.523 121.96,92.229 129.248,92.229 135.752,85.725 138.049,85.725 138.947,86.623 P6.23@138.947,86.892 ; v1(141.605,86.995) 141.605,104.455 142.763,105.613 R34.2@145.198,105.613
  Bottom Layer w0.152: P6.23@138.947,86.892 138.971,86.868 139.098,86.995 v1(141.605,86.995)
PD12: P6.24 R35.2 U1.59 | length 42.5
  Top Layer w0.152: U1.59@116.9,87.876 121.659,92.635 129.416,92.635 135.159,86.892 P6.24@136.407,86.892 ; v1(142.723,85.852) 142.651,85.924 142.651,94.391 144.45,96.19 R35.2@145.21,96.19
  Bottom Layer w0.152: P6.24@136.407,86.892 137.447,85.852 138.46,85.852 138.5,85.812 142.683,85.812 v1(142.723,85.852)
PD13: P6.26 R36.2 U1.60 | length 33.2
  Top Layer w0.152: U1.60@116.547,88.23 121.358,93.041 129.585,93.041 133.091,89.535 P6.26@136.407,89.535 ; v1(144.272,86.995) 145.071,86.995 R36.2@145.198,87.122
  Bottom Layer w0.152: P6.26@136.407,89.432 136.407,89.399 137.795,88.011 139.794,88.011 140.073,87.732 142.138,87.732 142.875,86.995 v1(144.272,86.995)
PD14: P6.25 R37.2 U1.61 | length 42.6
  Top Layer w0.152: U1.61@116.193,88.584 121.056,93.447 129.753,93.447 132.522,90.678 137.16,90.678 138.406,89.432 P6.25@138.947,89.432 ; v1(143.637,88.138) 143.637,86.332 143.709,86.26 143.709,79.049 144.628,78.13 R37.2@145.198,78.13
  Bottom Layer w0.152: P6.25@138.947,89.432 140.241,88.138 v1(143.637,88.138)
PD15: P6.28 R50.2 U1.62 | length 52.2
  Top Layer w0.152: U1.62@115.839,88.937 120.755,93.853 129.921,93.853 131.953,91.821 136.153,91.821 P6.28@136.407,92.075 ; P6.28@136.407,91.972 136.981,91.972 138.275,90.678 139.573,90.678 140.136,90.115 140.136,72.589 143.739,68.986 R50.2@145.224,68.986
V0: B1.2 Q1.2 R1.2 R22.2 | length 10.1
  Top Layer w0.152: B1.2@66.147,115.927 67.69,115.927 68.915,114.701 R1.2@70.399,114.701 70.399,112.694 Q1.2@70.299,112.594
  Top Layer w1: R22.2@63.147,116.502 65.572,116.502 B1.2@66.147,115.927
V1: B2.2 Q2.2 R2.2 R23.2 | length 10.3
  Top Layer w0.152: B2.2@66.147,106.68 67.69,106.68 68.915,105.454 R2.2@70.374,105.454 ; Q2.2@70.274,103.303 70.374,103.403 R2.2@70.374,105.454 ; R2.2@70.374,105.512 R2.2@70.374,105.454 ; R2.2@70.399,105.454 R2.2@70.374,105.454
  Top Layer w1: R23.2@63.147,107.35 65.477,107.35 B2.2@66.147,106.68
V2: B3.2 Q3.2 R3.2 R24.2 | length 10.3
  Top Layer w0.152: B3.2@66.147,97.521 67.69,97.521 68.915,96.295 R3.2@70.399,96.295 ; Q3.2@70.299,94.191 70.399,94.291 R3.2@70.399,96.295 ; R3.2@70.399,96.368 R3.2@70.399,96.295
  Top Layer w1: R24.2@63.147,98.191 65.477,98.191 B3.2@66.147,97.521
V3: B4.2 Q4.2 R4.2 R25.2 | length 10
  Top Layer w0.152: B4.2@66.147,88.443 67.69,88.443 68.915,87.217 R4.2@70.399,87.217 ; Q4.2@70.299,85.301 70.399,85.401 R4.2@70.399,87.217 ; R4.2@70.399,87.224 R4.2@70.399,87.217
  Top Layer w1: R25.2@63.147,89.035 65.555,89.035 B4.2@66.147,88.443
V4: B5.2 Q5.2 R5.2 R26.2 | length 10
  Top Layer w0.152: B5.2@66.147,79.21 67.69,79.21 68.915,77.984 R5.2@70.399,77.984 ; Q5.2@70.299,76.157 70.399,76.257 R5.2@70.399,78.08
  Top Layer w1: R26.2@63.147,79.88 65.477,79.88 B5.2@66.147,79.21
V5: B6.2 Q11.2 R11.2 R43.2 | length 10
  Top Layer w0.152: B6.2@66.147,70.054 67.69,70.054 68.915,68.829 R11.2@70.399,68.829 ; Q11.2@70.299,67.013 70.399,67.113 R11.2@70.399,68.829 ; R11.2@70.399,68.961 R11.2@70.399,68.829
  Top Layer w1: R43.2@63.147,70.724 65.477,70.724 B6.2@66.147,70.054
V6: B7.2 Q12.2 R12.2 R44.2 | length 10.1
  Top Layer w0.152: B7.2@66.147,60.899 67.69,60.899 68.915,59.673 R12.2@70.399,59.673 ; Q12.2@70.299,57.791 70.399,57.891 R12.2@70.399,59.673 ; R12.2@70.399,59.817 R12.2@70.399,59.673
  Top Layer w1: R44.2@63.147,61.569 65.477,61.569 B7.2@66.147,60.899
V7: B8.2 Q13.2 R13.2 R45.2 | length 10.2
  Top Layer w0.152: B8.2@66.147,51.743 67.69,51.743 68.915,50.518 R13.2@70.399,50.518 ; Q13.2@70.299,48.571 70.399,48.671 R13.2@70.399,50.518 ; R13.2@70.399,50.648 R13.2@70.399,50.518
  Top Layer w1: R45.2@63.147,52.413 65.477,52.413 B8.2@66.147,51.743
V8: B9.2 Q14.2 R14.2 R46.2 | length 10.1
  Top Layer w0.152: B9.2@66.147,42.588 67.69,42.588 68.915,41.362 R14.2@70.399,41.362 ; Q14.2@70.35,39.479 70.45,39.579 R14.2@70.45,41.504
  Top Layer w1: R46.2@63.147,43.258 65.477,43.258 B9.2@66.147,42.588
V9: B10.2 Q15.2 R15.2 R47.2 | length 10.2
  Top Layer w0.152: B10.2@66.147,33.432 67.69,33.432 68.915,32.206 R15.2@70.399,32.206 ; Q15.2@70.299,30.234 70.399,30.334 R15.2@70.399,32.36
  Top Layer w1: R47.2@63.147,34.102 65.477,34.102 B10.2@66.147,33.432
V10: B11.2 Q21.2 R27.2 R57.2 | length 9.9
  Top Layer w0.152: Q21.2@150.523,112.66 150.523,114.459 R27.2@150.225,114.757 153.072,114.757 B11.2@154.147,115.832
  Top Layer w1: B11.2@154.147,115.832 154.817,116.502 R57.2@157.147,116.502
V11: B12.2 Q22.2 R28.2 R58.2 | length 9.8
  Top Layer w0.152: Q22.2@150.376,103.618 150.376,105.416 R28.2@150.178,105.613 153.08,105.613 B12.2@154.147,106.68
  Top Layer w1: B12.2@154.147,106.68 154.817,107.35 R58.2@157.147,107.35
V12: B13.2 Q23.2 R29.2 R59.2 | length 9.8
  Top Layer w0.152: Q23.2@150.477,94.194 150.477,95.941 R29.2@150.229,96.19 152.816,96.19 B13.2@154.147,97.521
  Top Layer w1: B13.2@154.147,97.521 154.817,98.191 R59.2@157.147,98.191
V13: B14.2 Q24.2 R30.2 R60.2 | length 9.7
  Top Layer w0.152: Q24.2@150.511,85.253 150.204,85.56 R30.2@150.204,87.122 152.904,87.122 B14.2@154.147,88.365
  Top Layer w1: B14.2@154.147,88.365 154.817,89.035 R60.2@157.147,89.035
V14: B15.2 Q25.2 R31.2 R61.2 | length 9.8
  Top Layer w0.152: Q25.2@150.579,76.084 150.229,76.434 R31.2@150.229,78.13 153.068,78.13 B15.2@154.147,79.21
  Top Layer w1: B15.2@154.147,79.21 154.817,79.88 R61.2@157.147,79.88
V15: B16.2 Q36.2 R38.2 R69.2 | length 9.3
  Top Layer w0.152: Q36.2@150.655,66.889 150.655,68.893 150.749,68.986 153.079,68.986 B16.2@154.147,70.054
  Top Layer w1: B16.2@154.147,70.054 154.817,70.724 R69.2@157.147,70.724
V16: B17.2 Q37.2 R39.2 R70.2 | length 9.8
  Top Layer w0.152: Q37.2@150.452,57.72 150.452,59.619 R39.2@150.229,59.842 153.091,59.842 B17.2@154.147,60.899
  Top Layer w1: B17.2@154.147,60.899 154.817,61.569 R70.2@157.147,61.569
V17: B18.2 Q38.2 R40.2 R71.2 | length 9.8
  Top Layer w0.152: Q38.2@150.554,48.652 150.554,50.348 R40.2@150.229,50.673 153.077,50.673 B18.2@154.147,51.743
  Top Layer w1: B18.2@154.147,51.743 154.817,52.413 R71.2@157.147,52.413
V18: B19.2 Q39.2 R41.2 R72.2 | length 9.9
  Top Layer w0.152: Q39.2@150.477,39.305 150.477,41.255 R41.2@150.229,41.504 153.063,41.504 B19.2@154.147,42.588
  Top Layer w1: B19.2@154.147,42.588 154.817,43.258 R72.2@157.147,43.258
V19: B20.2 Q40.2 R42.2 R73.2 | length 9.6
  Top Layer w0.152: Q40.2@150.274,30.466 150.274,32.289 R42.2@150.178,32.385 153.1,32.385 B20.2@154.147,33.432
  Top Layer w1: B20.2@154.147,33.432 154.817,34.102 R73.2@157.147,34.102
VCC_3.3V: C1.2 C2.2 C5.2 C6.2 C7.2 C8.2 C9.2 C10.2 C18.1 D1.2 D3.2 JTAG.6 JTAG.8 R88.2 R99.2 R108.2 R109.2 U1.11 U1.22 U1.28 U1.50 U1.75 U1.100 U3.16 | length 231.9
  Top Layer w0.152: JTAG.6@112.954,102.819 JTAG.6@113.119,102.654
  Top Layer w0.2: D1.2@94.59,84.547 94.669,84.468 C7.2@96.342,84.468 ; R109.2@97.433,105.181 96.266,104.014 96.266,102.208 97.255,101.219 108.204,101.219 110.414,103.429 JTAG.8@110.414,102.819 ; U1.100@100.563,85.045 101.407,84.201 102.743,84.201 103.759,83.185 ; C2.2@104.565,70.374 104.565,72.006 U1.22@107.991,75.431 ; 105.156,80.391 105.156,81.788 103.759,83.185 ; U1.28@111.95,75.078 112.903,74.125 112.903,69.685 C5.2@112.814,69.596 ; C8.2@112.903,97.498 112.903,95.193 U1.75@111.243,93.533 109.982,92.272 109.982,89.408 103.759,83.185 ; U1.50@119.728,82.856 121.05,81.534 122.924,81.534 C9.2@123.375,81.084
  Top Layer w0.254: C7.2@96.342,84.468 96.456,84.582 100.1,84.582 U1.100@100.563,85.045 ; C6.2@101.658,76.269 101.658,76.877 U1.11@104.101,79.32 104.101,79.336 105.156,80.391
  Top Layer w0.3: C5.2@112.776,69.634 C5.2@112.903,69.761
  Top Layer w0.5: C8.2@112.903,97.498 113.03,97.625 v2(113.03,98.933)
  Top Layer w0.6: v2(122.428,100.203) R108.2@122.428,103.187 ; C9.2@123.375,81.084 C9.2@123.502,81.211 124.206,81.915 v2(124.206,82.423) v2(124.206,85.471) ; R88.2@129.999,72.085 130.075,72.009 v2(131.445,72.009) ; U3.16@132.308,37.473 135.009,37.473 136.097,38.561 v2(136.097,50.847)
  Top Layer w1.2: R99.2@102.895,68.758 104.556,68.758 C1.2@104.565,68.749 ; D3.2@103.072,54.427 103.072,56.209 v2(104.394,57.531) ; v2(104.648,59.055) C2.2@104.648,70.29 ; C5.2@112.814,69.596 114.808,69.596 C18.1@116.84,67.564
  Bottom Layer w0.5: 112.954,100.203 113.03,100.127 v2(113.03,98.933)
  Bottom Layer w0.6: v2(104.394,57.531) 121.412,57.531 ; JTAG.8@110.414,102.819 JTAG.6@112.954,102.819 112.954,100.203 v2(122.428,100.203) 123.952,98.679 123.952,85.725 v2(124.206,85.471) ; v2(124.206,82.423) 124.206,78.867 121.412,76.073 121.412,69.85 ; v2(131.445,72.009) 131.445,71.12 130.175,69.85 121.412,69.85 ; v2(136.097,50.847) 133.858,53.086 133.858,53.213 129.54,57.531 121.412,57.531 ; 121.412,57.531 121.412,69.85
  Bottom Layer w1.2: v2(104.394,57.531) 104.648,57.785 v2(104.648,59.055) ; C18.1@117.094,67.54 121.309,67.54
VCC_5V: CON1.1 D2.2 R48.1 R62.1 R98.1 U5.2 | length 78.4
  Top Layer w0.5: U5.2@100.672,40.527 100.672,38.52 v4(100.711,38.481) ; v4(117.475,34.036) 124.46,34.036 125.412,33.084 CON1.1@125.412,31.977 125.412,30.544 127.408,28.548 132.053,28.548 135.509,32.004 R62.1@135.851,32.004
  Top Layer w0.6: R48.1@86.107,46.33 86.995,47.217 v2(86.995,48.387)
  Top Layer w1.2: U5.2@100.672,42.927 100.147,43.452 D2.2@100.147,46.552 100.147,57.856 101.485,59.194 R98.1@102.921,59.194
  Bottom Layer w0.5: v4(100.711,38.481) 100.838,38.608 108.712,38.608 113.284,34.036 v4(117.475,34.036)
  Bottom Layer w0.6: v2(86.995,48.387) v2(100.203,48.387)
VCC_5V1: C20.1 C21.2 D2.1 P3.1 R106.2 U4.1 | length 49.9
  Top Layer w0.152: R106.2@92.901,63.5 93.472,63.5 v1(94.234,62.738) ; D2.1@98.147,46.552 98.298,46.703 98.171,46.83 v1(98.171,58.801)
  Top Layer w1.2: D2.1@98.147,46.552 C21.2@96.467,46.552 96.467,43.772 U4.1@96.297,43.602 97.028,42.871 97.028,39.243 95.672,37.887 C20.1@95.672,35.152 100.09,30.734 104.978,30.734 P3.1@108.661,27.051
  Bottom Layer w0.152: v1(94.234,62.738) v1(98.171,58.801)
VCC_9V: C19.2 C24.1 P4.1 U4.3 | length 28.4
  Top Layer w1.2: C24.1@86.589,37.382 92.158,37.382 92.329,37.211 ; C19.2@90.172,43.572 90.202,43.602 U4.3@93.297,43.602 92.329,42.634 92.329,37.211 ; P4.1@98.247,27.051 92.329,32.969 92.329,37.211
VREF: R89.1 R99.1 U1.21 | length 11.4
  Top Layer w0.2: R89.1@101.143,67.083 101.395,67.335 R99.1@101.395,68.758 101.395,69.543 U1.21@107.637,75.785
pads on no net: CLEAR.3 P6.19 QUERY.3 START.3 U1.73 U3.9 U3.10 U3.11 U3.12 U3.13 U3.14 U3.15

## Polygon pours and split planes (outlines as drawn)
GND on Top Layer "Top Layer-GND" (solid, remove dead copper, pour order 0): 66.294,123.952 66.294,118.237 69.469,118.237 69.469,113.919 76.327,113.919 76.327,44.45 86.868,44.45 86.868,51.054 96.012,51.054 96.012,68.072 107.569,68.072 107.569,46.431 112.649,46.431 112.649,34.417 115.951,34.417 115.951,24.257 144.653,24.257 144.653,114.173 152.273,114.173 152.273,123.952
GND on Bottom Layer "Top Layer-GND" (solid, remove dead copper, pour order 2): 66.294,123.952 66.294,117.602 69.215,117.602 69.215,113.919 76.454,113.919 76.454,44.45 87.122,44.45 87.122,44.704 112.649,44.704 112.649,31.242 144.653,31.242 144.653,114.046 152.527,114.046 152.527,123.952

## Keep-outs
Keep-Out Layer:
  circle w0.127: c63.147,26.952 r1.5
  circle w0.127: c157.147,26.952 r1.5
  circle w0.127: c157.147,120.952 r1.5
  circle w0.127: c63.147,120.952 r1.5
  lines w0.152: 60.147,23.952 60.147,123.952 160.147,123.952 160.147,23.952 60.147,23.952

## Other copper
Top Layer:
  region net NetQ62_3: 159.766,32.639 155.448,32.639 155.448,30.122 159.766,30.122
  region net NetQ61_3: 159.766,41.183 155.448,41.183 155.448,36.738 159.766,36.738
  region net NetQ60_3: 159.766,50.338 155.448,50.338 155.448,45.893 159.766,45.893
  region net NetQ59_3: 159.766,59.494 155.448,59.494 155.448,55.049 159.766,55.049
  region net NetQ58_3: 159.766,68.649 155.448,68.649 155.448,64.204 159.766,64.204
  region net NetQ57_3: 159.766,77.805 155.448,77.805 155.448,73.36 159.766,73.36
  region net NetQ56_3: 159.766,86.96 155.448,86.96 155.448,82.515 159.766,82.515
  region net NetQ55_3: 159.766,96.116 155.448,96.116 155.448,91.671 159.766,91.671
  region net NetQ54_3: 159.766,105.275 155.448,105.275 155.448,100.83 159.766,100.83
  region net NetQ53_3: 159.766,114.427 155.448,114.427 155.448,109.982 159.766,109.982
  rectangle net AGND: 110.236,24.765 115.062,34.036
  rectangle net AGND: 105.664,66.04 108.331,69.215
  rectangle net NetQ52_3: 60.706,28.931 64.872,32.233
  region net NetQ26_3: 64.872,114.513 60.706,114.513 60.706,108.849 64.872,108.849
  region net NetQ27_3: 64.872,105.266 60.706,105.266 60.706,99.602 64.872,99.602
  region net NetQ28_3: 64.872,96.107 60.706,96.107 60.706,90.443 64.872,90.443
  region net NetQ29_3: 64.872,87.029 60.706,87.029 60.706,81.364 64.872,81.364
  region net NetQ30_3: 64.872,77.796 60.706,77.796 60.706,72.131 64.872,72.131
  region net NetQ48_3: 64.872,68.64 60.706,68.64 60.706,62.976 64.872,62.976
  region net NetQ49_3: 64.872,59.485 60.706,59.485 60.706,53.82 64.872,53.82
  region net NetQ50_3: 64.872,50.329 60.706,50.329 60.706,44.665 64.872,44.665
  region net NetQ51_3: 64.872,41.173 60.706,41.173 60.706,35.509 64.872,35.509
Bottom Layer:
  rectangle net AGND: 144.907,25.654 146.685,113.665
  region: 159.893,35.075 155.448,35.075 155.448,30.099 159.893,30.099
  region: 159.893,44.231 155.448,44.231 155.448,36.738 159.893,36.738
  region: 159.893,53.386 155.448,53.386 155.448,45.893 159.893,45.893
  region: 159.893,80.853 155.448,80.853 155.448,73.36 159.893,73.36
  region: 159.893,62.542 155.448,62.542 155.448,55.049 159.893,55.049
  region: 159.893,71.697 155.448,71.697 155.448,64.204 159.893,64.204
  region: 159.893,90.008 155.448,90.008 155.448,82.515 159.893,82.515
  region: 159.893,99.164 155.448,99.164 155.448,91.671 159.893,91.671
  region: 159.893,108.323 155.448,108.323 155.448,100.83 159.893,100.83
  region net AGND: 154.94,27.432 111.76,27.432 111.76,24.511 154.94,24.511
  region net AGND: 154.94,32.004 152.527,32.004 152.527,24.511 154.94,24.511
  region: 159.893,117.475 155.448,117.475 155.448,109.982 159.893,109.982
  rectangle net AGND: 110.236,25.019 114.681,28.956
  rectangle net AGND: 96.52,28.575 115.316,33.274
  rectangle net AGND: 83.312,24.638 96.52,33.274
  region net AGND: 94.285,28.118 67.412,28.118 67.412,24.689 94.285,24.689
  rectangle net AGND: 65.456,62.814 68.021,68.249
  rectangle net AGND: 67.412,24.689 68.377,114.046
  rectangle net AGND: 65.456,29.413 68.021,31.627
  rectangle net AGND: 65.456,35.347 68.021,40.783
  rectangle net AGND: 65.456,44.503 68.021,49.938
  rectangle net AGND: 65.456,53.658 68.021,59.094
  rectangle net AGND: 65.456,71.969 68.021,77.405
  rectangle net AGND: 65.456,81.202 68.021,86.638
  rectangle net AGND: 65.456,90.28 68.021,95.716
  rectangle net AGND: 65.456,99.44 68.021,104.875
  rectangle net AGND: 65.456,108.687 68.021,114.122
  region: 64.872,34.736 60.706,34.736 60.706,28.931 64.872,28.931
  region: 64.872,117.231 60.706,117.231 60.706,109.001 64.872,109.001
  region: 64.872,107.984 60.706,107.984 60.706,99.754 64.872,99.754
  region: 64.872,98.825 60.706,98.825 60.706,90.595 64.872,90.595
  region: 64.872,89.746 60.706,89.746 60.706,81.517 64.872,81.517
  region: 64.872,80.513 60.706,80.513 60.706,72.284 64.872,72.284
  region: 64.872,71.358 60.706,71.358 60.706,63.128 64.872,63.128
  region: 64.872,62.202 60.706,62.202 60.706,53.973 64.872,53.973
  region: 64.872,53.047 60.706,53.047 60.706,44.817 64.872,44.817
  region: 64.872,43.891 60.706,43.891 60.706,35.662 64.872,35.662
  rectangle net AGND: 73.482,24.816 76.124,113.513

## Silkscreen, mask and mechanical layers (free items; w line width, h text height)
Top Overlay:
  drawing of 1649 lines, arcs and shapes, not listed
  text "VCC" at 151.003,121.92 h1.2
  text "VCC" at 65.786,121.793 h1.2
  text "!!!!!" at 70.104,120.65 h1.2
  text "!!!!!" at 72.771,120.65 h1.2
  text "!!!!!" at 148.082,120.65 h1.2
  text "!!!!!" at 144.78,120.523 h1.2
  text "GND" at 151.003,120.142 h1.2
  text "GND" at 65.786,120.015 h1.2
  text "RESET" at 131.826,101.346 h1.2 r90
  text "GND" at 76.581,25.527 h1.2
  text "9V" at 80.391,25.527 h1.2
  text "GND" at 83.058,25.527 h1.2
  text "5V" at 86.741,25.527 h1.2
Top Solder:
  text "BAT TEST V1.1" at 100.838,116.967 h4

## Text inside footprints (layer, text, board x,y; h text height)
BOOT0: Top Overlay "1" at 101.27,107.391 h1.2 r270; Top Overlay "2" at 103.81,107.899 h1.2 r270; Top Overlay "4" at 103.81,101.295 h1.2 r270; Top Overlay "3" at 101.27,101.295 h1.2 r270
BOOT1: Top Overlay "1" at 126.213,69.856 h1.2 r90; Top Overlay "2" at 123.673,69.348 h1.2 r90; Top Overlay "4" at 123.673,75.952 h1.2 r90; Top Overlay "3" at 126.213,75.952 h1.2 r90
C18: Top Overlay "+" at 119.507,66.04 h1.2
C20: Top Overlay "+" at 97.172,37.565 h1.2 r90
C24: Top Overlay "+" at 89.433,36.22 h1.2
C25: Top Overlay "+" at 107.01,35.154 h1.2
JTAG: Top Overlay "10" at 106.35,103.327 h1.2 r180; Top Overlay "9" at 106.35,105.867 h1.2 r180; Top Overlay "1" at 120.066,105.867 h1.2 r180; Top Overlay "2" at 120.574,103.327 h1.2 r180
P5: Top Overlay "36" at 83.115,103.656 h1.2 r90; Top Overlay "35" at 85.655,103.656 h1.2 r90; Top Overlay "1" at 85.655,56.412 h1.2 r90; Top Overlay "2" at 83.115,55.904 h1.2 r90
P6: Top Overlay "36" at 136.915,103.656 h1.2 r90; Top Overlay "35" at 139.455,103.656 h1.2 r90; Top Overlay "1" at 139.455,56.412 h1.2 r90; Top Overlay "2" at 136.915,55.904 h1.2 r90